# Altium PCB IMU_level_shifter_11_connectors.PcbDoc
Units mm, origin at the board's own origin, x right, y up, seen from the top; angles counter-clockwise.
Board outline 45 x 30 mm, 2 copper layers (Top Layer, Bottom Layer); 12 components, 8 nets, 42 pads, 0 vias.
Unrouted connection lines stored in the file: 27.
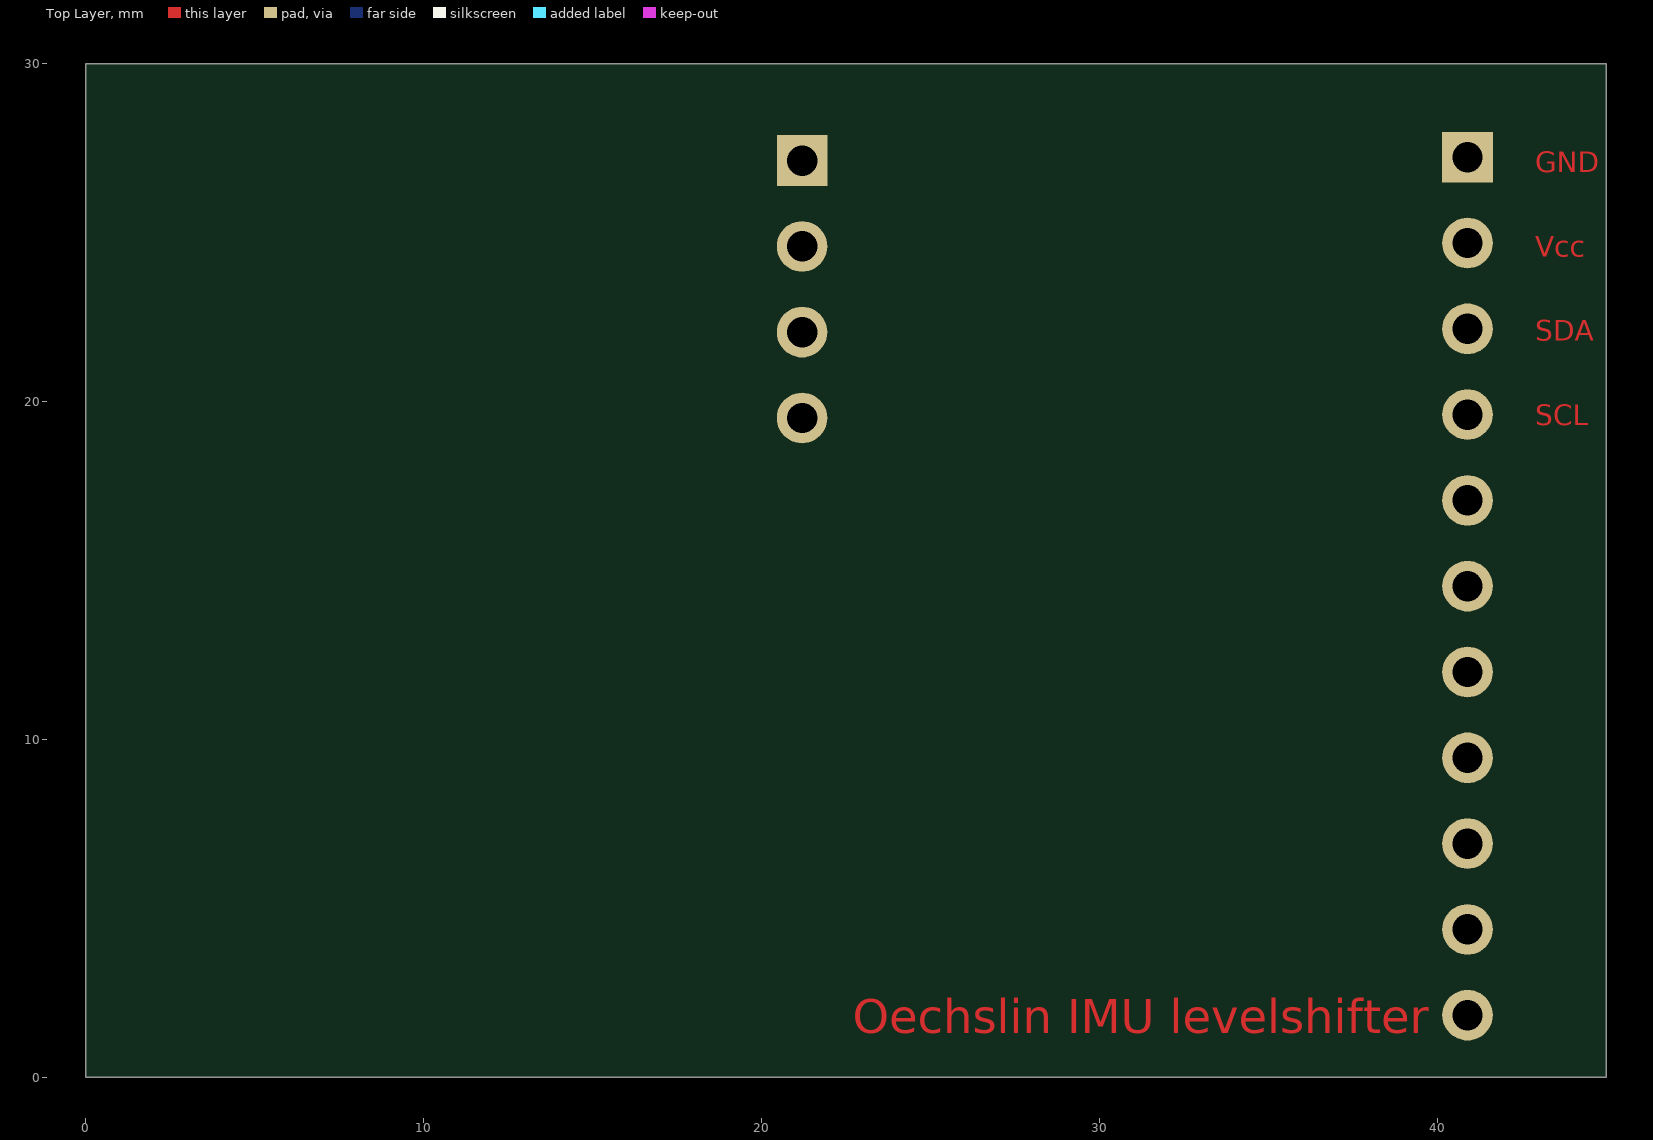
[diagram p0: Top Layer view]
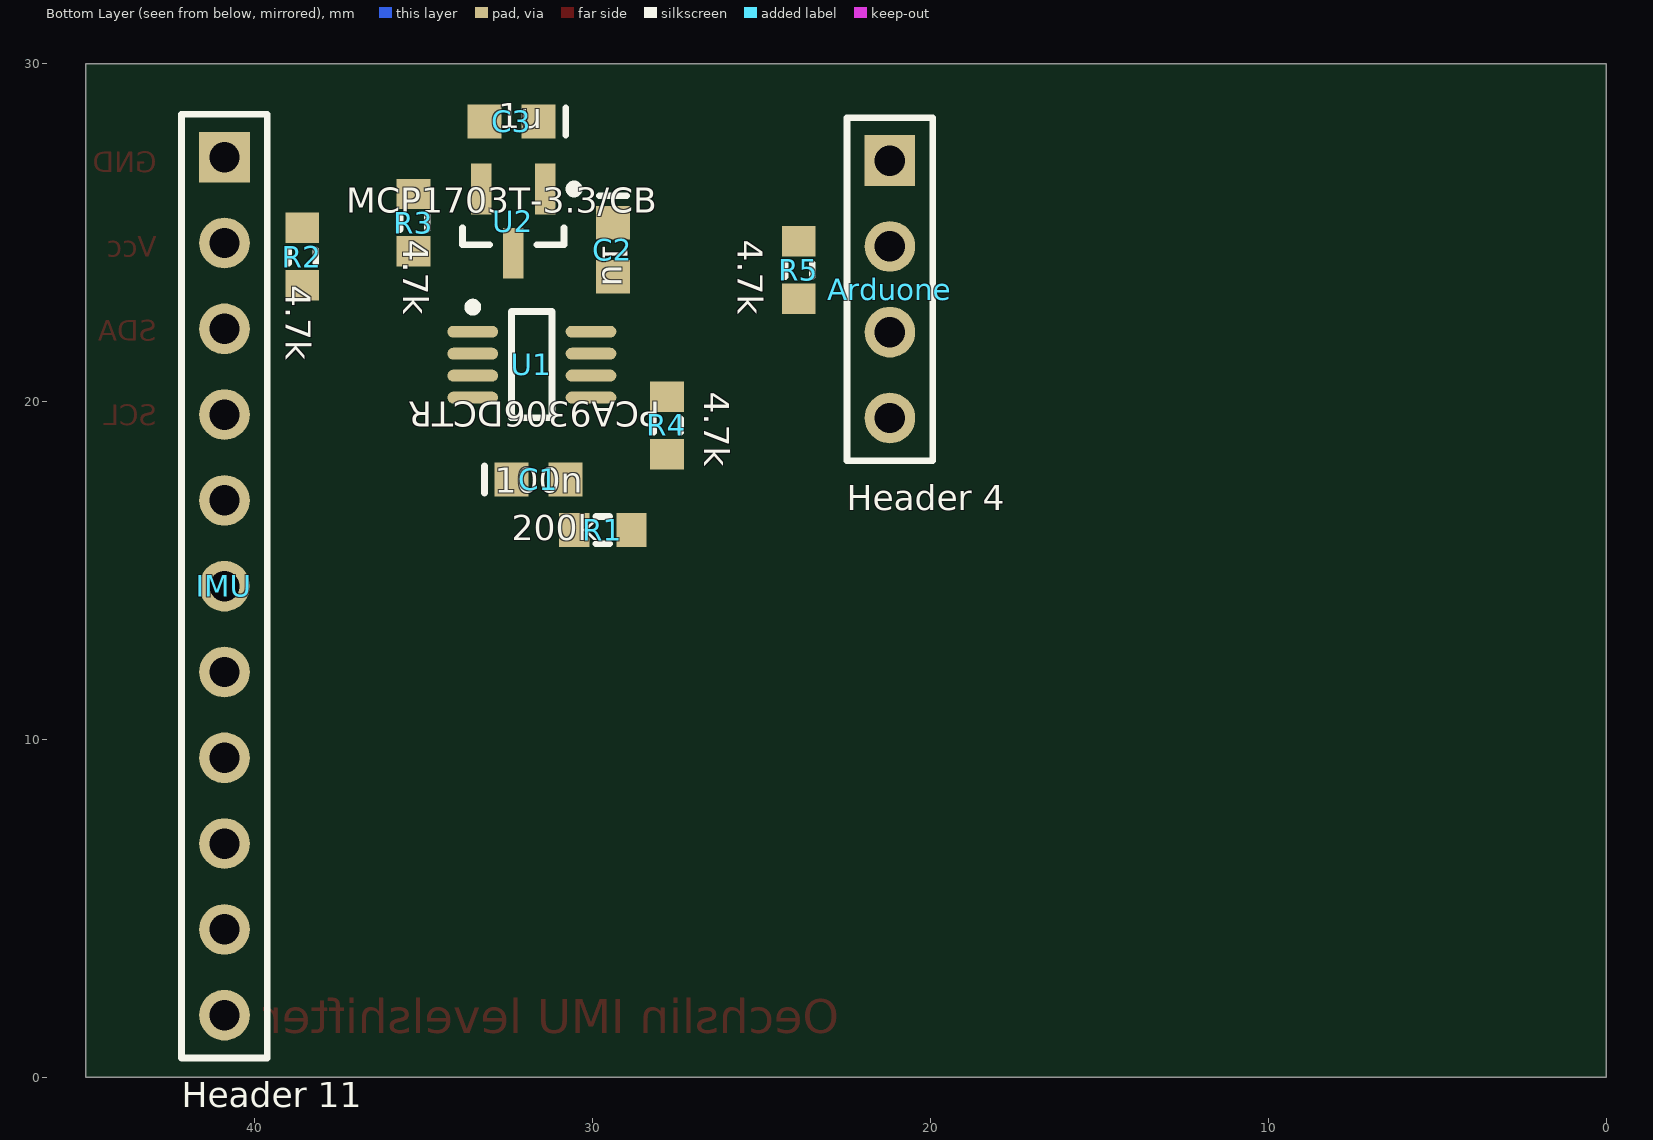
[diagram p1: Bottom Layer view, seen from below]

## Layer stack, top to bottom
Top Solder: solder mask 0.0102, Solder Resist, Dk 3.5
Top Layer: signal copper 0.0356
Dielectric 1: dielectric 0.32, FR-4, Dk 4.8
Bottom Layer: signal copper 0.0356
Bottom Solder: solder mask 0.0102, Solder Resist, Dk 3.5

## Board outline
0,0 45,0 45,30 0,30

## Design rules (kind name [scope] priority, off if disabled: settings)
Clearance Clearance_Polygons [InPolygon] p1: gap=0.3 ignorepadtopadclearanceinfootprint=FALSE except(0: Arc-Hole Track-Hole SMDPad-Hole THPad-Hole Via-Hole Fill-Hole Poly-Hole Region-Hole Text-Hole)
Clearance [All] p2: gap=0.25 ignorepadtopadclearanceinfootprint=FALSE except(0: Arc-Hole Track-Hole SMDPad-Hole THPad-Hole Via-Hole Fill-Hole Poly-Hole Region-Hole Text-Hole)
HoleSize [All] p1: absolutevalues=TRUE maxlimit=10 minlimit=0.6 maxpercent=80.000 minpercent=20.000
MinimumSolderMaskSliver [All] p1 off: minsoldermaskwidth=0.15
MinimumSolderMaskSliver SilkscreenOverComponentPads [All] p2 off: minsoldermaskwidth=0.254
PolygonConnect [All] p1: connectstyle=Relief reliefconductorwidth=0.254 reliefentries=4 polygonreliefangle="90 Angle" airgapwidth=0.254
RoutingVias [All] p1: holewidth=0.5 width=0.8 viastyle="Through Hole" minholewidth=0.35 minwidth=0.5 maxholewidth=1.5 maxwidth=2
SilkToSilkClearance [All] p1 off: silktosilkclearance=0.254
SolderMaskExpansion [All] p1: expansion=0.102
Width [All] p1: maxlimit=5 minlimit=0.25 preferedwidth=0.5
27 further rules are at their usual default settings.

## Components (designator, comment, footprint, x,y, rotation, side; value= is the part's Value field where it differs from the comment)
Arduone "Header 4" HDR1X4 21.2,27.14 r270 bottom
C1 "100n" CAPC1608N 31.6,17.7 r180 bottom
C2 "1u" CAPC1608N 29.4,24.5 r270 bottom
C3 "1u" CAPC1608N 32.4,28.3 r0 bottom
IMU "Header 11" HDR1X11 40.9,27.24 r270 bottom
R1 "200k" RESC1608N 29.7,16.2 r0 bottom
R2 "4.7k" RESC1608N 38.6,24.3 r90 bottom
R3 "4.7k" RESC1608N 35.3,25.3 r90 bottom
R4 "4.7k" RESC1608N 27.8,19.3 r270 bottom
R5 "4.7k" RESC1608N 23.9,23.9 r90 bottom
U1 "PCA9306DCTR" DCT8_N 31.8,21.1 r180 bottom
U2 "MCP1703T-3.3/CB" SOT23-3N 32.35,25.35 r270 bottom

## Footprints (in the part's own frame and the unit in brackets; to place one, negate y for a bottom-side part, rotate by r counter-clockwise, add the part's x,y. Pads: shape width x height; smd on the part's side, far side on the other; paste and mask are expansions set on the pad)
CAPC1608N [mm] "Chip Capacitor, Body 1.6x0.8mm, IPC Medium Density"
  rect 1x1 smd: 1(-0.8,0) 2(0.8,0)
  silkscreen extent -1.6,-0.4 -1.6,0.4, body extent -0.87,-0.48 0.87,0.48, height 0.85
DCT8_N [mm] "TSOP, 8-Leads, Body 3x2.8mm, Pitch 0.65mm, IPC Medium Density"
  oval 1.5x0.35 smd: 1(-1.75,0.975) 2(-1.75,0.325) 3(-1.75,-0.325) 4(-1.75,-0.975) 5(1.75,-0.975) 6(1.75,-0.325) 7(1.75,0.325) 8(1.75,0.975)
  silkscreen extent -1.88,-1.57 0.6,1.82, body extent -1.45,-1.57 1.45,1.58, height 1.3
HDR1X4 [mm] "Connector; Header; 4 Position"
  rect 1.5x1.5 hole 0.9: 1(0,0)
  round 1.5 hole 0.9: 2(2.54,0) 3(5.08,0) 4(7.62,0)
  silkscreen extent -1.27,-1.27 8.89,1.27
HDR1X11 [mm] "Connector; Header; 11 Position"
  rect 1.5x1.5 hole 0.9: 1(0,0)
  round 1.5 hole 0.9: 2(2.54,0) 3(5.08,0) 4(7.62,0) 5(10.16,0) 6(12.7,0) 7(15.24,0) 8(17.78,0) 9(20.32,0) 10(22.86,0) 11(25.4,0)
  silkscreen extent -1.27,-1.27 26.67,1.27
RESC1608N [mm] "Chip Resistor, Body 1.6x0.8mm, IPC Medium Density"
  rect 0.9x1 smd: 1(-0.85,0) 2(0.85,0)
  silkscreen extent -0.2,-0.4 0.2,0.4, body extent -0.85,-0.48 0.85,0.48, height 0.6
SOT23-3N [mm] "SOT23, 3-Leads, Body 2.9x1.3mm, Pitch 0.95mm, Lead Span 2.5mm, IPC Medium Density"
  rect 1.5x0.6 smd: 1(-0.95,0.95) 2(-0.95,-0.95) 3(0.95,0)
  silkscreen extent -1.07,-1.5 0.7,1.92, body extent -0.7,-1.5 0.7,1.5, height 1.1

## Part data
Arduone: "Header, 4-Pin", LatestRevisionDate=17-Jul-2002, LatestRevisionNote="Re-released for DXP Platform.", Publisher="Altium Limited"
C1 C2 C3: library part Cap, "Capacitor", LatestRevisionDate=17-Jul-2002, LatestRevisionNote="Re-released for DXP Platform.", PackageDescription="Radial Cap, Thru-Hole; 2 Leads; 0.3 in Pin Spacing", PackageReference=RAD-0.3, Published=8-Jun-2000, Publisher="Altium Limited"
IMU: "Header, 11-Pin", LatestRevisionDate=17-Jul-2002, LatestRevisionNote="Re-released for DXP Platform.", Publisher="Altium Limited"
R1 R2 R3 R4 R5: library part Res1, "Resistor", LatestRevisionDate=17-Jul-2002, LatestRevisionNote="Re-released for DXP Platform.", PackageDescription="Axial Device, Thru-Hole; 2 Leads; 0.3 in Pin Spacing", PackageReference=AXIAL-0.3, Published=8-Jun-2000, Publisher="Altium Limited"
U1: "Dual Bi-Directional I2C-Bus and SMBus Voltage Level-Translator, 0 to 5.5 V, -40 to 85 degC, 8-pin SM8 (DCT), Green (RoHS & no Sb/Br)", 5V Tolerant I/O=Yes, Manufacturer="Texas Instruments", Max Frequency(kHz)=400, On-Chip Power-on-Reset=No, Rating=Catalog, Supplier Part Number 1=296-18509-2-ND, Code_JEDEC=MO-187-DA, ComponentLink1Description=Datasheet, ComponentLink1URL=http://www.ti.com/general/docs/lit/getliterature.tsp?genericPartNumber=PCA9306&fileType=pdf, ComponentLink2Description="Package Specification", ComponentLink2URL=http://www.ti.com/litv/pdf/mpds049b, DatasheetVersion=SCPS113J, Eco-Plan="Green (RoHS & no Sb/Br)", Enable Pin=Yes, fSCLK(Max)(MHz)=400, Function="Voltage Translator", Mounting Technology="Surface Mount", No. of Outputs=2, Open Drain I/O Type=Yes, PackageDescription="8-Pin Thin Small Outline Package 3 x 2.8 mm Body ,0.65 mm Pitch", PackageReference=DCT8, PackageVersion="revC, Sep-2002", PartNumber=PCA9306DCTR, SubFamily="I2C Special Function", Supplier 1=Digi-Key, Supplier 2=Digi-Key, Supplier 3=Digi-Key, Supplier 4=Farnell, Supplier 5=Farnell, Supplier 6=Newark, Supplier 7=Mouser, Supplier Part Number 2=296-18509-1-ND, Supplier Part Number 3=296-18509-6-ND, Supplier Part Number 4=1470936RL, Supplier Part Number 5=1470936, Supplier Part Number 6=65J6232, Supplier Part Number 7=595-PCA9306DCTR, tpd max(ns)=1.5, Vcc range(V)="0 to 5.5"
U2: library part MCP1703T/CB, "250 mA, 16V, Low Quiescent Current LDO Regulator"

## Nets (pads, with @x,y where several pads share a name; then routed paths per layer and width w, separated by ;. In a path a pad name is that pad's centre, name@x,y a point inside that pad or via, vN(x,y) a via of type N, cw(c..) or ccw(c..) an arc to the next point about the centre after c; other vN are vias at no path point)
3V3: C3.2 IMU.2 R2.2 R3.2 U1.2 U2.2
5V: Arduone.2 C2.2 R1.1 R4.2 R5.2 U2.3
GND: Arduone.1 C1.1 C2.1 C3.1 IMU.1 U1.1 U2.1
NetArduone_3: Arduone.3 R5.1 U1.5
NetArduone_4: Arduone.4 R4.1 U1.6
NetC1_2: C1.2 R1.2 U1.7 U1.8
NetIMU_3: IMU.3 R3.1 U1.4
NetIMU_4: IMU.4 R2.1 U1.3
pads on no net: IMU.5 IMU.6 IMU.7 IMU.8 IMU.9 IMU.10 IMU.11

## Other copper
Top Layer:
  text "GND" at 42.9,26.8 h0.6
  text "Vcc" at 42.9,24.3 h0.6
  text "SDA" at 42.9,21.8 h0.6
  text "SCL" at 42.9,19.3 h0.6
  text "Oechslin IMU levelshifter" at 22.7,1.3 h1

## Silkscreen, mask and mechanical layers (free items; w line width, h text height)
Mechanical 1:
  lines w0.254: 0,30 0,0 45,0 ; 0.227,30 45.227,30